# Altium PCB PCB.PcbDoc
Units mil, origin at the board's own origin, x right, y up, seen from the top; angles counter-clockwise.
Board outline 2375 x 2000 mil, 2 copper layers (Top Layer, Bottom Layer); 31 components, 14 nets, 83 pads, 43 vias.
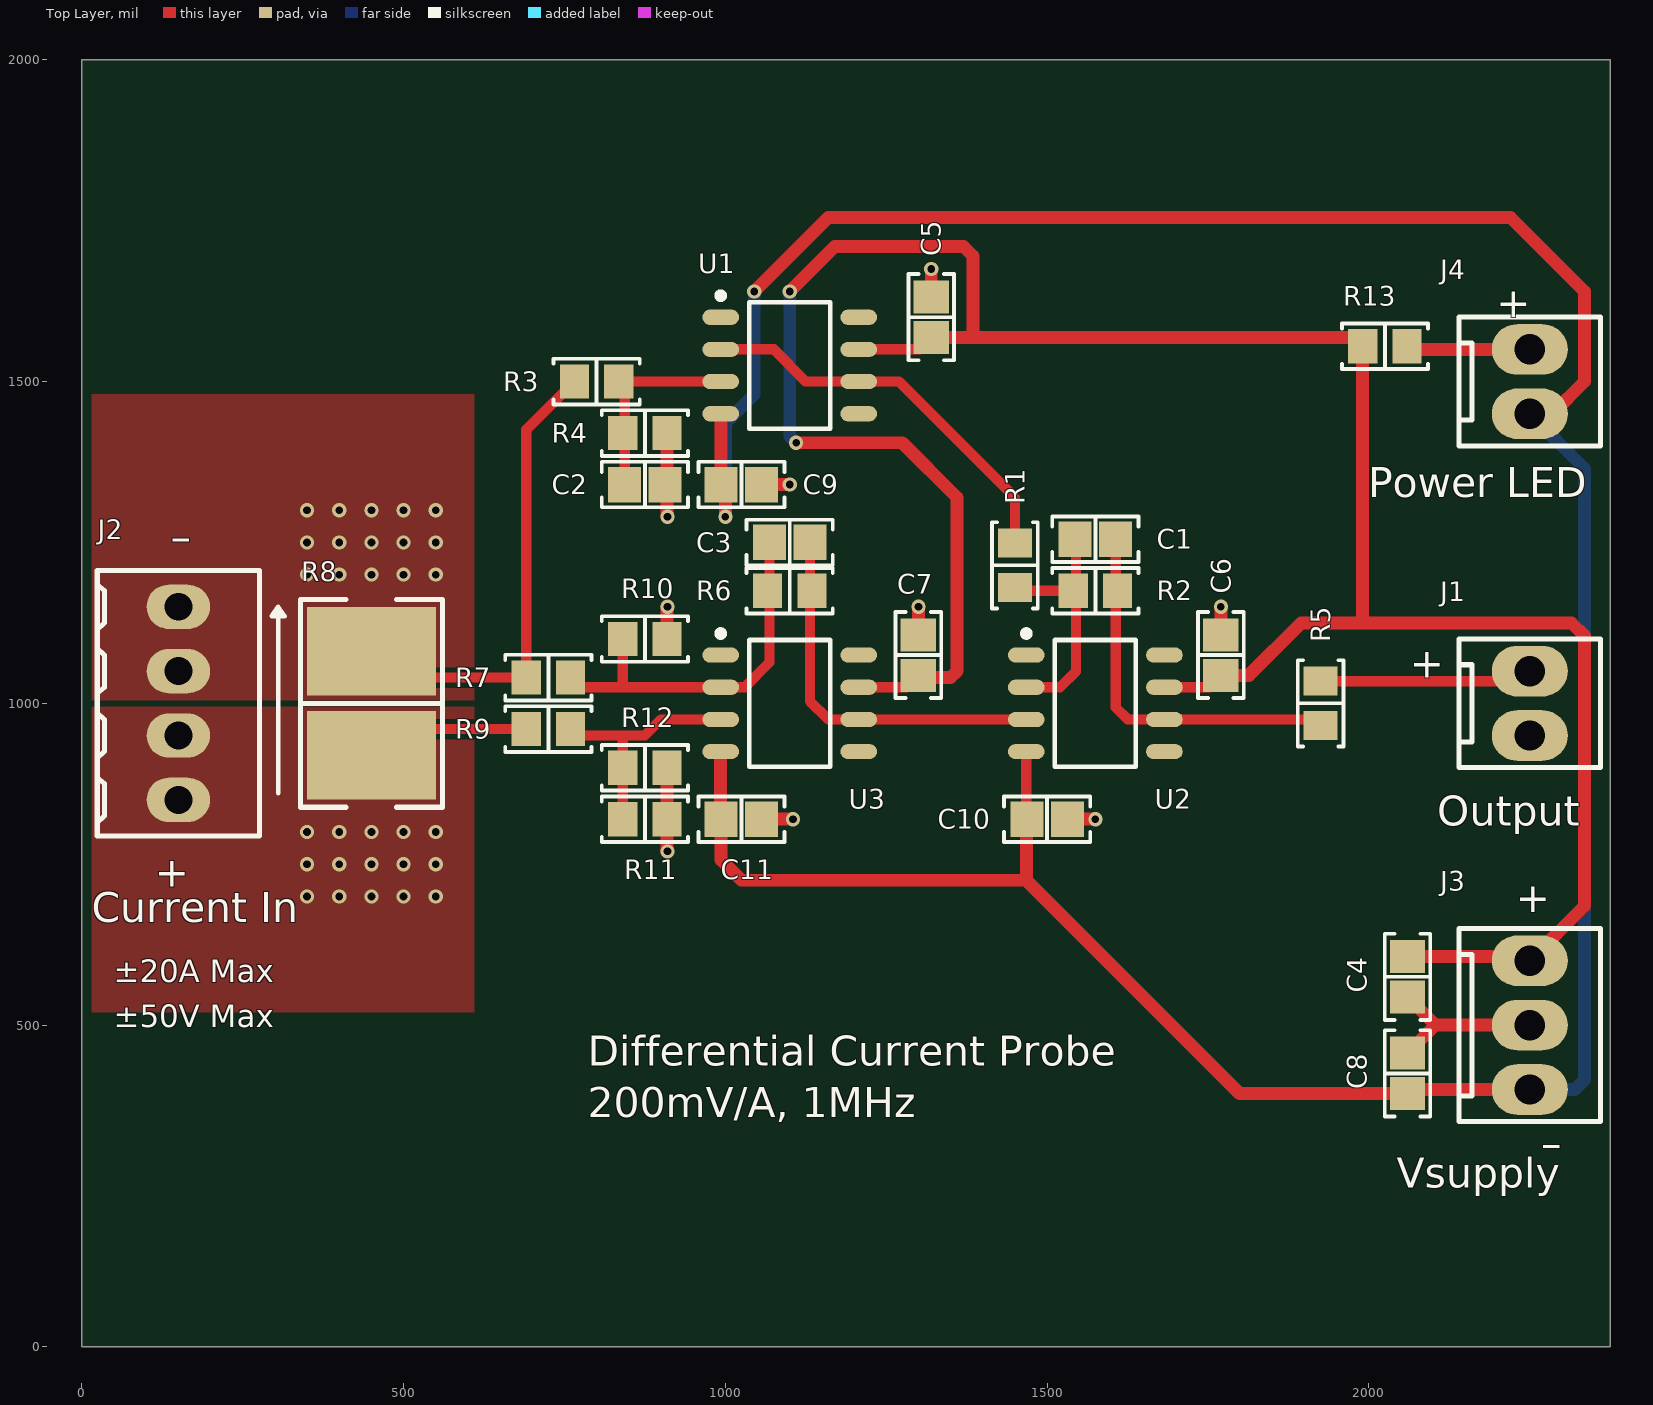
[diagram p0: Top Layer view]
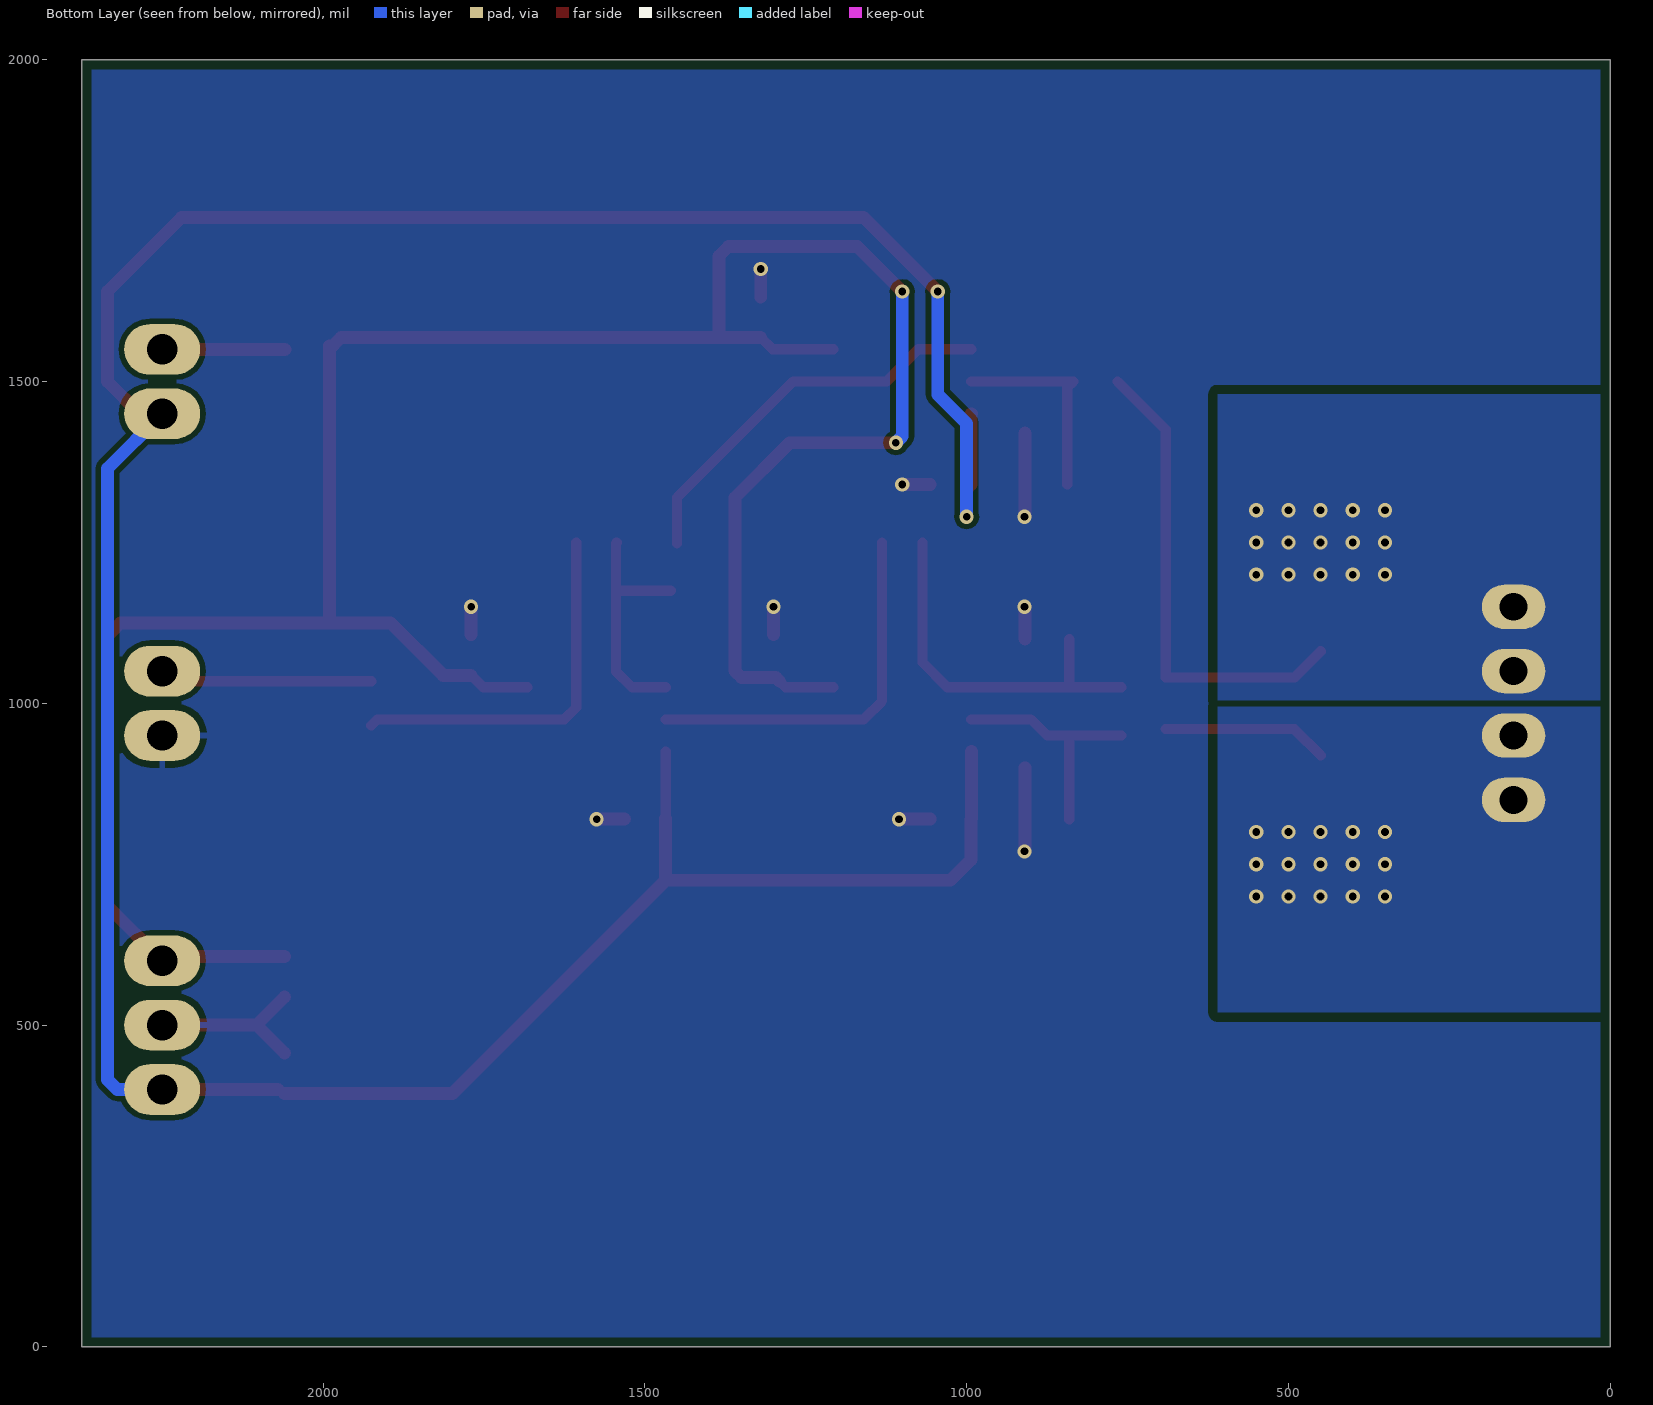
[diagram p1: Bottom Layer view, seen from below]
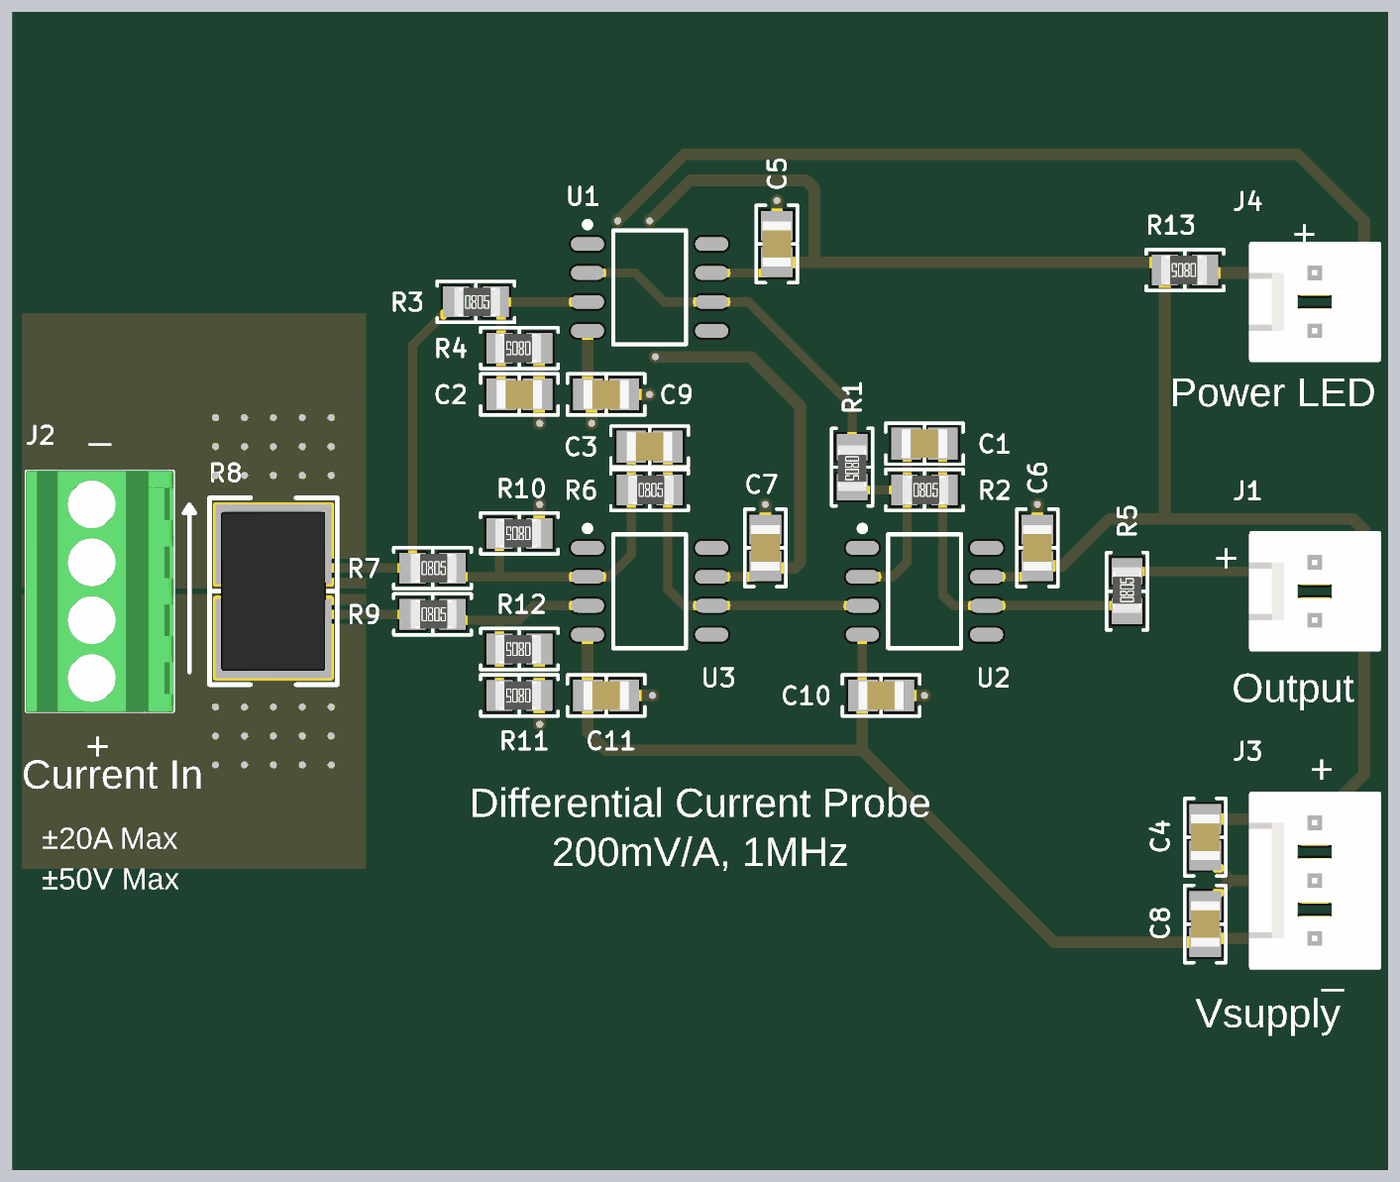
[diagram p2: 3D render of the assembled board from above, using the file's embedded part models]

## Layer stack, top to bottom
Top Solder: solder mask 0.4, Solder Resist, Dk 3.5
Top Layer: signal copper 1.4
Dielectric1: dielectric 12.6, FR-4, Dk 4.8
Bottom Layer: signal copper 1.4
Bottom Solder: solder mask 0.4, Solder Resist, Dk 3.5

## Board outline
0,0 0,2000 2375,2000 2375,0

## Design rules (kind name [scope] priority, off if disabled: settings)
AcuteAngle [All] p1: minimum=4.50000000000000E+0001 checktracksonly=FALSE
AssemblyTestpoint [(IsPad And (OnTopLayer Or OnBottomLayer)) Or (IsPad And OnMultiLayer)] p1: testpointundercomponent=FALSE minsize=40 maxsize=100 preferedsize=60 minholesize=0 maxholesize=40 preferedholesize=32 testpointgrid=1 usegrid=TRUE gridtolerance=0.01 allowsidetop=TRUE allowsidebottom=TRUE
BoardOutlineClearance [All] p1: gap=15 ignorepadtopadclearanceinfootprint=FALSE
Clearance Clearance_HV [InNetClass('HV') vs not InNetClass('HV')] p1: gap=15 ignorepadtopadclearanceinfootprint=FALSE
Clearance [All] p2: gap=8 ignorepadtopadclearanceinfootprint=FALSE
FabricationTestPointUsage TestPointUsage [All] p1: valid=0 allowmultiple=FALSE validrequireatleafs=TRUE
FabricationTestpoint Testpoint [(IsPad And (OnTopLayer Or OnBottomLayer)) Or (IsPad And OnMultiLayer)] p1: side=3 testpointundercomponent=TRUE minsize=40 maxsize=100 preferedsize=60 minholesize=0 maxholesize=40 preferedholesize=32 testpointgrid=1 allowsidetop=TRUE allowsidebottom=TRUE usegrid=TRUE gridtolerance=0.01
HoleSize [All] p1: absolutevalues=TRUE maxlimit=125 minlimit=12 maxpercent=80.000 minpercent=20.000
MinimumAnnularRing [All] p1: minimumring=5
MinimumSolderMaskSliver [All] p1: minsoldermaskwidth=4
PolygonConnect PolygonConnect_Isense [InNet('+ISense') or InNet('-ISense')] p1: connectstyle=Direct reliefconductorwidth=40 reliefentries=4 polygonreliefangle="90 Angle" airgapwidth=8
PolygonConnect [All] p2: thpad.connectstyle=Relief thpad.reliefconductorwidth=10 thpad.reliefentries=4 thpad.polygonreliefangle="90 Angle" thpad.airgapwidth=10 smdpad.connectstyle=Relief smdpad.reliefconductorwidth=10 smdpad.reliefentries=4 smdpad.polygonreliefangle="90 Angle" smdpad.airgapwidth=10 via.connectstyle=Direct via.reliefconductorwidth=10 via.reliefentries=4 via.polygonreliefangle="90 Angle" via.airgapwidth=10
RoutingVias [All] p1: holewidth=12 width=20 viastyle="Through Hole" minholewidth=10 minwidth=18 maxholewidth=28 maxwidth=50
SilkToSilkClearance [IsText] p1: silktosilkclearance=5
SilkToSolderMaskClearance SilkscreenOverComponentPads [IsPad vs IsText] p1: minsilkscreentomaskgap=5 clearancetoexposedcopper=TRUE
SolderMaskExpansion [All] p1: expansion=4 istentingtop=FALSE
UnRoutedNet [All] p1: checkbadconnections=TRUE
Width [All] p1: maxlimit=24 minlimit=8 preferedwidth=10
22 further rules are at their usual default settings.

## Classes and differential pairs
net class HV: +ISense -ISense

## Components (designator, comment, footprint, x,y, rotation, side; value= is the part's Value field where it differs from the comment)
C1 "1.1pF" "CAP 0805_2012" 1575,1255 r0 top
C2 "1.1pF" "CAP 0805_2012" 875,1340 r0 top
C3 "1.1pF" "CAP 0805_2012" 1100,1250 r0 top
C4 "10µF" "CAP 0805_2012" 2060,575 r90 top
C5 "0.1µF" "CAP 0805_2012" 1320,1600 r90 top
C6 "0.1µF" "CAP 0805_2012" 1770,1075 r90 top
C7 "0.1µF" "CAP 0805_2012" 1300,1075 r90 top
C8 "10µF" "CAP 0805_2012" 2060,425 r90 top
C9 "0.1µF" "CAP 0805_2012" 1025,1340 r180 top
C10 "0.1µF" "CAP 0805_2012" 1500,820 r180 top
C11 "0.1µF" "CAP 0805_2012" 1025,820 r180 top
J1 "Output" "MOLEX KK 0022272021" 2250,1000 r270 top
J2 "Current In" "TE 282834-4" 150,1000 r90 top
J3 "Vsupply" "MOLEX KK 0022272031" 2250,500 r270 top
J4 "Power LED" "MOLEX KK 0022272021" 2250,1500 r270 top
R1 "200 Ohms" "RES 0805_2012" 1450,1214.45 r270 top
R2 "3.83 kOhms" "RES 0805_2012" 1575,1175 r0 top
R3 "100 kOhms" "RES 0805_2012" 800,1500 r0 top
R4 "19.1 Ohms" "RES 0805_2012" 875,1420 r180 top
R5 "49.9 Ohms" "RES 0805_2012" 1925,1000 r90 top
R6 "100 kOhms" "RES 0805_2012" 1100,1175 r0 top
R7 "100 kOhms" "RES 0805_2012" 725,1040 r0 top
R8 "10 mOhms" "VISHAY WSHP2818" 450,1000 r90 top
R9 "100 kOhms" "RES 0805_2012" 725,960 r0 top
R10 "20 kOhms" "RES 0805_2012" 875,1100 r180 top
R11 "20 kOhms" "RES 0805_2012" 875,820 r180 top
R12 "100 kOhms" "RES 0805_2012" 875,900 r180 top
R13 "3.83 kOhms" "RES 0805_2012" 2025,1555 r180 top
U1 "OPA192" SOIC127P600X175-8N 1100,1525 r0 top
U2 "OPA192" SOIC127P600X175-8N 1575,1000 r0 top
U3 "OPA192" SOIC127P600X175-8N 1100,1000 r0 top

## Footprints (in the part's own frame and the unit in brackets; to place one, negate y for a bottom-side part, rotate by r counter-clockwise, add the part's x,y. Pads: shape width x height; smd on the part's side, far side on the other; paste and mask are expansions set on the pad)
"CAP 0805_2012" [mm] "Chip Capacitor, 2-Leads, Body 2.00x1.20mm, IPC Medium Density"
  rect 1.3x1.4 smd: 1(-0.8,0) 2(0.8,0)
  silkscreen extent -1.7,-0.9 1.7,0.9, body extent -1,-0.64 1,0.64, height 1.26
"MOLEX KK 0022272021" [mm]
  oval 2x3 hole 1.2: 1(-1.27,0) 2(1.27,0)
  silkscreen extent -2.54,-2.79 2.54,2.79, body extent -2.54,-2.9 2.54,2.9, height 11.7
"MOLEX KK 0022272031" [mm]
  oval 2x3 hole 1.2: 1(-2.54,0) 2(0,0) 3(2.54,0)
  silkscreen extent -3.81,-2.79 3.81,2.79, body extent -3.81,-2.9 3.81,2.9, height 11.7
"RES 0805_2012" [mm] "Chip Resistor, 2-Leads, Body 2.00x1.25mm, IPC Medium Density"
  rect 1.15x1.35 smd: 1(-0.875,0) 2(0.875,0)
  silkscreen extent -1.7,-0.9 1.7,0.9, body extent -0.95,-0.62 1.05,0.63, height 0.6
SOIC127P600X175-8N [mm] "SOIC, 8-Leads, Body 4.90x3.90mm, Pitch 1.27mm, IPC Medium Density"
  oval 1.45x0.6 smd: 1(-2.725,1.905) 2(-2.725,0.635) 3(-2.725,-0.635) 4(-2.725,-1.905) 5(2.725,-1.905) 6(2.725,-0.635) 7(2.725,0.635) 8(2.725,1.905)
  silkscreen extent -2.85,-2.5 1.6,2.88, body extent -2,-2.5 2,2.5, height 1.75
"TE 282834-4" [mm]
  oval 1.75x2.5 hole 1.1: 1(-3.81,0) 2(-1.27,0) 3(1.27,0) 4(3.81,0)
  silkscreen extent -5.24,-3.2 5.24,3.2, body extent -5.31,-3.25 5.31,3.25, height 10
"VISHAY WSHP2818" [mm] "Chip Resistor, 2-Leads, Body 7.10x4.60mm, IPC Medium Density"
  rect 3.5x5.1 smd: 1(-2.055,0) 2(2.055,0)
  silkscreen extent -4.1,-2.8 4.1,2.8, body extent -3.55,-2.3 3.55,2.3, height 1.5

## Part data
C1 C2 C3: library part 600F1R1BT250XT, "CAP CER 1.1PF 250V C0G/NP0 0805", Device Package="0805 (2012 Metric)", Manufacturer="American Technical Ceramics", Operating Temperature="-55°C ~ 125°C", Supplier Part Number 1=1284-1028-1-ND, Temperature Coefficient="C0G, NP0", Tolerance=±0.1pF, Voltage - Rated=250V, Applications="RF, Microwave, High Frequency, Bypass, Decoupling", Capacitance=1.1pF, ComponentLink1Description=Datasheet, ComponentLink1URL=http://www.atceramics.com/UserFiles/600f.pdf, ComponentLink2Description="DigiKey Link", ComponentLink2URL=http://digikey.com/product-detail/en/american-technical-ceramics/600F1R1BT250XT/1284-1028-1-ND/3905408, Features="High Q, Low Loss, Ultra Low ESR", LastUpdated="1/21/2020 12:02:44 AM", Lifecycle Status=Active, Minimum Order=1, Mounting Type="Surface Mount, MLCC", Package / Case="0805 (2012 Metric)", Packaging=TapeAndReel, Part Number=600F1R1BT250XT, Part Status=Active, PartId=15482, Price=0.25, Series="ATC 600F", Size / Dimension="0.079\" L x 0.049\" W (2.01mm x 1.24mm)", Supplier 1=DigiKey, Thickness (Max)="0.051\" (1.30mm)"
C4 C8: library part CL21A106KAYNNNE, "CAP CER 10UF 25V X5R 0805", Device Package="0805 (2012 Metric)", Manufacturer="Samsung Electro-Mechanics", Operating Temperature="-55°C ~ 85°C", Supplier Part Number 1=1276-2891-1-ND, Temperature Coefficient=X5R, Tolerance=±10%, Voltage - Rated=25V, Applications="General Purpose", Capacitance=10µF, ComponentLink1Description=Datasheet, ComponentLink1URL=http://www.samsungsem.com/kr/support/product-search/mlcc/CL21A106KAYNNNE.jsp, ComponentLink2Description="DigiKey Link", ComponentLink2URL=http://digikey.com/product-detail/en/samsung-electro-mechanics/CL21A106KAYNNNE/1276-2891-1-ND/3890977, LastUpdated="1/21/2020 12:02:50 AM", Lifecycle Status=Active, Minimum Order=1, Mounting Type="Surface Mount, MLCC", Package / Case="0805 (2012 Metric)", Packaging=TapeAndReel, Part Number=CL21A106KAYNNNE, Part Status=Active, PartId=13105, Price=0.05, Series=CL, Size / Dimension="0.079\" L x 0.049\" W (2.00mm x 1.25mm)", Supplier 1=DigiKey, Thickness (Max)="0.057\" (1.45mm)"
C5 C6 C7 C9 C10 C11: library part CC0805MRX7R8BB104, "CAP CER 0.1UF 25V X7R 0805", Device Package="0805 (2012 Metric)", Manufacturer=Yageo, Operating Temperature="-55°C ~ 125°C", Supplier Part Number 1=311-4348-1-ND, Temperature Coefficient=X7R, Tolerance=±20%, Voltage - Rated=25V, Applications="General Purpose", Capacitance=0.1µF, ComponentLink1Description=Datasheet, ComponentLink1URL=https://www.yageo.com/upload/media/product/productsearch/datasheet/mlcc/UPY-GPHC_X7R_6.3V-to-50V_18.pdf, ComponentLink2Description="DigiKey Link", ComponentLink2URL=http://digikey.com/product-detail/en/yageo/CC0805MRX7R8BB104/311-4348-1-ND/8025437, LastUpdated="1/21/2020 12:02:57 AM", Lifecycle Status=Active, Minimum Order=1, Mounting Type="Surface Mount, MLCC", Package / Case="0805 (2012 Metric)", Packaging=TapeAndReel, Part Number=CC0805MRX7R8BB104, Part Status=Active, PartId=8377, Price=0.02, Series=CC, Size / Dimension="0.079\" L x 0.049\" W (2.00mm x 1.25mm)", Supplier 1=DigiKey, Thickness (Max)="0.037\" (0.95mm)"
J1 J4: library part 0022272021, "CONN HEADER VERT 2POS 2.54MM", Insulation Color=Natural, Manufacturer=Molex, Material Flammability Rating="UL94 V-0", Supplier Part Number 1=WM4111-ND, ComponentLink1Description=Datasheet, ComponentLink1URL=https://www.molex.com/pdm_docs/sd/022272021_sd.pdf, ComponentLink2Description="DigiKey Link", ComponentLink2URL=http://digikey.com/product-detail/en/molex/0022272021/WM4111-ND/1130577, Connector Type=Header, Contact Finish - Mating=Tin, Contact Finish - Post=Tin, Contact Finish Thickness - Mating="100.0µin (2.54µm)", Contact Length - Mating="0.295\" (7.49mm)", Contact Length - Post="0.140\" (3.56mm)", Contact Material=Brass, Contact Shape=Square, Contact Type="Male Pin", Fastening Type="Friction Lock", Insulation Height="0.461\" (11.70mm)", Insulation Material="Polyamide (PA), Nylon", LastUpdated="1/12/2020 11:51:43 PM", Lifecycle Status=Active, Minimum Order=1, Mounting Type="Through Hole", Number of Positions=2, Number of Positions Loaded=All, Number of Rows=1, Overall Contact Length="0.560\" (14.22mm)", Packaging=Bulk, Part Number=0022272021, Part Status=Active, PartId=76, Pitch - Mating="0.100\" (2.54mm)", Price=0.27, Series="KK 6410", Shrouding="Shrouded - 1 Wall", Style="Board to Cable/Wire", Supplier 1=DigiKey, Termination=Solder
J2: library part 282834-4, "TERM BLK 4P SIDE ENT 2.54MM PCB", Color=Green, Current=10A, Manufacturer="TE Connectivity AMP Connectors", Supplier Part Number 1=A98335-ND, Voltage=150V, ComponentLink1Description=Datasheet, ComponentLink1URL=https://www.te.com/commerce/DocumentDelivery/DDEController?Action=srchrtrv&DocNm=282834&DocType=Customer+Drawing&DocLang=English, ComponentLink2Description="DigiKey Link", ComponentLink2URL=http://digikey.com/product-detail/en/te-connectivity-amp-connectors/282834-4/A98335-ND/1153265, LastUpdated="1/15/2020 4:16:05 AM", Lifecycle Status=Active, Mating Orientation="Horizontal with Board", Minimum Order=1, Mounting Type="Through Hole", Number of Levels=1, Packaging=Bulk, Part Number=282834-4, Part Status=Active, Pitch="0.100\" (2.54mm)", Positions Per Level=4, Price=2.68, Series=Buchanan, Supplier 1=DigiKey, Wire Gauge="16-30 AWG", Wire Termination="Screw - Rising Cage Clamp"
J3: library part 0022272031, "CONN HEADER VERT 3POS 2.54MM", Insulation Color=Natural, Manufacturer=Molex, Material Flammability Rating="UL94 V-0", Supplier Part Number 1=WM4112-ND, ComponentLink1Description=Datasheet, ComponentLink1URL=https://www.molex.com/pdm_docs/sd/022272031_sd.pdf, ComponentLink2Description="DigiKey Link", ComponentLink2URL=http://digikey.com/product-detail/en/molex/0022272031/WM4112-ND/1130578, Connector Type=Header, Contact Finish - Mating=Tin, Contact Finish - Post=Tin, Contact Finish Thickness - Mating="100.0µin (2.54µm)", Contact Length - Mating="0.295\" (7.49mm)", Contact Length - Post="0.140\" (3.56mm)", Contact Material=Brass, Contact Shape=Square, Contact Type="Male Pin", Fastening Type="Friction Lock", Insulation Height="0.461\" (11.70mm)", Insulation Material="Polyamide (PA), Nylon", LastUpdated="1/12/2020 11:51:54 PM", Lifecycle Status=Active, Minimum Order=1, Mounting Type="Through Hole", Number of Positions=3, Number of Positions Loaded=All, Number of Rows=1, Overall Contact Length="0.560\" (14.22mm)", Packaging=Bulk, Part Number=0022272031, Part Status=Active, PartId=77, Pitch - Mating="0.100\" (2.54mm)", Price=0.37, Series="KK 6410", Shrouding="Shrouded - 1 Wall", Style="Board to Cable/Wire", Supplier 1=DigiKey, Termination=Solder
R1: library part ERJ-PB6B2000V, "RES SMD 200 OHM 0.1% 1/4W 0805", Device Package="0805 (2012 Metric)", Manufacturer="Panasonic Electronic Components", Operating Temperature="-55°C ~ 155°C", Power (Watts)="0.25W, 1/4W", Ratings=AEC-Q200, Supplier Device Package=0805, Supplier Part Number 1=P20512CT-ND, Temperature Coefficient=±50ppm/°C, Tolerance=±0.1%, ComponentLink1Description=Datasheet, ComponentLink1URL=https://industrial.panasonic.com/cdbs/www-data/pdf/RDM0000/AOA0000C328.pdf, ComponentLink2Description="DigiKey Link", ComponentLink2URL=http://digikey.com/product-detail/en/panasonic-electronic-components/ERJ-PB6B2000V/P20512CT-ND/6214767, Composition="Thick Film", Features="Automotive AEC-Q200, Pulse Withstanding", Height - Seated (Max)="0.028\" (0.70mm)", LastUpdated="1/21/2020 1:48:33 AM", Lifecycle Status=Active, Minimum Order=1, Number of Terminations=2, Package / Case="0805 (2012 Metric)", Packaging=TapeAndReel, Part Number=ERJ-PB6B2000V, Part Status=Active, PartId=31144, Price=0.04, Resistance="200 Ohms", Series=ERJ, Size / Dimension="0.079\" L x 0.049\" W (2.00mm x 1.25mm)", Supplier 1=DigiKey
R2 R13: library part ERJ-PB6D3831V, "RES SMD 3.83K OHM 0.5% 1/4W 0805", Device Package="0805 (2012 Metric)", Manufacturer="Panasonic Electronic Components", Operating Temperature="-55°C ~ 155°C", Power (Watts)="0.25W, 1/4W", Ratings=AEC-Q200, Supplier Device Package=0805, Supplier Part Number 1=P21084CT-ND, Temperature Coefficient=±50ppm/°C, Tolerance=±0.5%, ComponentLink1Description=Datasheet, ComponentLink1URL=https://industrial.panasonic.com/cdbs/www-data/pdf/RDM0000/AOA0000C328.pdf, ComponentLink2Description="DigiKey Link", ComponentLink2URL=http://digikey.com/product-detail/en/panasonic-electronic-components/ERJ-PB6D3831V/P21084CT-ND/6215339, Composition="Thick Film", Features="Automotive AEC-Q200, Pulse Withstanding", Height - Seated (Max)="0.028\" (0.70mm)", LastUpdated="1/21/2020 1:46:41 AM", Lifecycle Status=Active, Minimum Order=1, Number of Terminations=2, Package / Case="0805 (2012 Metric)", Packaging=TapeAndReel, Part Number=ERJ-PB6D3831V, Part Status=Active, PartId=35478, Price=0.03, Resistance="3.83 kOhms", Series=ERJ, Size / Dimension="0.079\" L x 0.049\" W (2.00mm x 1.25mm)", Supplier 1=DigiKey
R3 R6 R7 R9 R12: library part ERA-6AEB104V, "RES 100K OHM 0.1% 1/8W 0805", Device Package="0805 (2012 Metric)", Manufacturer="Panasonic Electronic Components", Operating Temperature="-55°C ~ 155°C", Power (Watts)="0.125W, 1/8W", Ratings=AEC-Q200, Supplier Device Package=0805, Supplier Part Number 1=P100KDACT-ND, Temperature Coefficient=±25ppm/°C, Tolerance=±0.1%, ComponentLink1Description=Datasheet, ComponentLink1URL=https://industrial.panasonic.com/cdbs/www-data/pdf/RDM0000/AOA0000C307.pdf, ComponentLink2Description="DigiKey Link", ComponentLink2URL=http://digikey.com/product-detail/en/panasonic-electronic-components/ERA-6AEB104V/P100KDACT-ND/1465995, Composition="Thin Film", Features="Automotive AEC-Q200", Height - Seated (Max)="0.024\" (0.60mm)", LastUpdated="1/21/2020 1:49:56 AM", Lifecycle Status=Active, Minimum Order=1, Number of Terminations=2, Package / Case="0805 (2012 Metric)", Packaging=TapeAndReel, Part Number=ERA-6AEB104V, Part Status=Active, PartId=28063, Price=0.04, Resistance="100 kOhms", Series=ERA-6A, Size / Dimension="0.079\" L x 0.049\" W (2.00mm x 1.25mm)", Supplier 1=DigiKey
R4: library part 5-1625868-4, "RES SMD 19.1 OHM 0.1% 1/4W 0805", Device Package="0805 (2012 Metric)", Manufacturer="TE Connectivity Passive Product", Operating Temperature="-55°C ~ 155°C", Power (Watts)="0.25W, 1/4W", Supplier Device Package=0805, Supplier Part Number 1=A110378CT-ND, Temperature Coefficient=±25ppm/°C, Tolerance=±0.1%, ComponentLink1Description=Datasheet, ComponentLink1URL=https://www.te.com/commerce/DocumentDelivery/DDEController?Action=srchrtrv&DocNm=1773272&DocType=DS&DocLang=English, ComponentLink2Description="DigiKey Link", ComponentLink2URL=http://digikey.com/product-detail/en/te-connectivity-passive-product/5-1625868-4/A110378CT-ND/4034733, Composition="Thin Film", Height - Seated (Max)="0.026\" (0.65mm)", LastUpdated="1/21/2020 1:47:41 AM", Lifecycle Status=Active, Minimum Order=1, Number of Terminations=2, Package / Case="0805 (2012 Metric)", Packaging=TapeAndReel, Part Number=5-1625868-4, Part Status=Active, PartId=33143, Price=0.15, Resistance="19.1 Ohms", Series="RP73P, Holsworthy", Size / Dimension="0.079\" L x 0.049\" W (2.00mm x 1.25mm)", Supplier 1=DigiKey
R5: library part ERJ-6ENF49R9V, "RES SMD 49.9 OHM 1% 1/8W 0805", Device Package="0805 (2012 Metric)", Manufacturer="Panasonic Electronic Components", Operating Temperature="-55°C ~ 155°C", Power (Watts)="0.125W, 1/8W", Ratings=AEC-Q200, Supplier Device Package=0805, Supplier Part Number 1=P49.9CCT-ND, Temperature Coefficient=±100ppm/°C, Tolerance=±1%, ComponentLink1Description=Datasheet, ComponentLink1URL=https://industrial.panasonic.com/cdbs/www-data/pdf/RDA0000/AOA0000C304.pdf, ComponentLink2Description="DigiKey Link", ComponentLink2URL=http://digikey.com/product-detail/en/panasonic-electronic-components/ERJ-6ENF49R9V/P49.9CCT-ND/118581, Composition="Thick Film", Features="Automotive AEC-Q200", Height - Seated (Max)="0.028\" (0.70mm)", LastUpdated="1/21/2020 1:48:04 AM", Lifecycle Status=Active, Minimum Order=1, Number of Terminations=2, Package / Case="0805 (2012 Metric)", Packaging=TapeAndReel, Part Number=ERJ-6ENF49R9V, Part Status=Active, PartId=32256, Price=0.01, Resistance="49.9 Ohms", Series=ERJ, Size / Dimension="0.079\" L x 0.049\" W (2.00mm x 1.25mm)", Supplier 1=DigiKey
R8: library part WSHP2818R0100FEA, "RES 0.01 OHM 1% 10W 2818", Device Package=Nonstandard, Manufacturer="Vishay Dale", Operating Temperature="-65°C ~ 170°C", Power (Watts)=10W, Ratings=AEC-Q200, Supplier Device Package=2818, Supplier Part Number 1=541-3276-1-ND, Temperature Coefficient=±75ppm/°C, Tolerance=±1%, ComponentLink1Description=Datasheet, ComponentLink1URL=http://www.vishay.com/docs/30347/wshp2818.pdf, ComponentLink2Description="DigiKey Link", ComponentLink2URL=http://digikey.com/product-detail/en/vishay-dale/WSHP2818R0100FEA/541-3276-1-ND/6605252, Composition="Metal Element", Features="Automotive AEC-Q200, Current Sense, Moisture Resistant, Pulse Withstanding", Height - Seated (Max)="0.069\" (1.75mm)", LastUpdated="2/4/2020 3:03:01 AM", Lifecycle Status=Active, Minimum Order=1, Number of Terminations=2, Package / Case=Nonstandard, Packaging=TapeAndReel, Part Number=WSHP2818R0100FEA, Part Status=Active, PartId=2681, Price=0.62, Resistance="10 mOhms", Series=WSHP2818, Size / Dimension="0.280\" L x 0.181\" W (7.10mm x 4.60mm)", Supplier 1=DigiKey
R10 R11: library part ERA-6ARW203V, "RES 20K OHM 0.05% 1/8W 0805", Device Package="0805 (2012 Metric)", Manufacturer="Panasonic Electronic Components", Operating Temperature="-55°C ~ 155°C", Power (Watts)="0.125W, 1/8W", Ratings=AEC-Q200, Supplier Device Package=0805, Supplier Part Number 1=P20KBSCT-ND, Temperature Coefficient=±10ppm/°C, Tolerance=±0.05%, ComponentLink1Description=Datasheet, ComponentLink1URL=https://industrial.panasonic.com/cdbs/www-data/pdf/RDM0000/AOA0000C307.pdf, ComponentLink2Description="DigiKey Link", ComponentLink2URL=http://digikey.com/product-detail/en/panasonic-electronic-components/ERA-6ARW203V/P20KBSCT-ND/3073407, Composition="Thin Film", Features="Automotive AEC-Q200", Height - Seated (Max)="0.024\" (0.60mm)", LastUpdated="1/21/2020 1:45:31 AM", Lifecycle Status=Active, Minimum Order=1, Number of Terminations=2, Package / Case="0805 (2012 Metric)", Packaging=TapeAndReel, Part Number=ERA-6ARW203V, Part Status=Active, PartId=37966, Price=0.24, Resistance="20 kOhms", Series=ERA-6A, Size / Dimension="0.079\" L x 0.049\" W (2.00mm x 1.25mm)", Supplier 1=DigiKey
U1 U2 U3: library part OPA192ID, "Precision, Rail to Rail I/O, Low Vos, Low Ib Op Amp", Manufacturer="Texas Instruments", Supplier Part Number 1=296-44516-5-ND, Component Type="Op Amp", ComponentLink1Description=Datasheet, ComponentLink1URL=http://www.ti.com/lit/ds/symlink/opa192.pdf, Created Date=2017-09-25, Designer="Alex Davis", MountType=SMT, PartNumber=OPA192, RoHS?=Yes, Supplier 1=Digi-Key

## Via types
v1: diameter 22, hole 12, Top Layer to Bottom Layer, tented both sides, 43 vias

## Nets (pads, with @x,y where several pads share a name; then routed paths per layer and width w, separated by ;. In a path a pad name is that pad's centre, name@x,y a point inside that pad or via, vN(x,y) a via of type N, cw(c..) or ccw(c..) an arc to the next point about the centre after c; other vN are vias at no path point)
+9V: C4.2 C5.1 C6.1 C7.1 J3.1 R13.2 U1.7 U2.7 U3.7 | length 4068.3
  Top Layer w16: U3.7 1281.5,1025 C7.1@1290.75,1034.25 ; U1.7 1301.5,1550 C5.1 ; U2.7 1751.5,1025 C6.1
  Top Layer w20: v1(1100,1640) 1170.01,1710 1370,1710 1385,1695 1385,1568.5 ; v1(1110,1405) 1275,1405 1360,1320 1360,1050 1350,1040 1296.5,1040 C7.1@1290.75,1034.25 ; C5.1 1385,1568.5 ; C6.1 1813.51,1043.5 1895.01,1125 1990,1125 ; R13.2@1990.55,1550 1972.05,1568.5 1385,1568.5 ; R13.2 1990,1554.45 1990,1125 ; C4.2 2243.51,606.5 J3.1 2335,685.01 2335,1105 2315,1125 1990,1125
  Bottom Layer w20: v1(1100,1640) 1100,1415 v1(1110,1405)
+ISense: J2.1 J2.2 R8.1 R9.1 | length 257.5
  Top Layer w16: R8.1 490.91,960 R9.1
  other v1: 350.01,699.99 400.01,699.99 450.01,699.99 500.01,699.99 550.01,699.99 350.01,749.99 400.01,749.99 450.01,749.99 500.01,749.99 550.01,749.99 350.01,799.99 400.01,799.99 450.01,799.99 500.01,799.99 550.01,799.99
-9V: C8.1 C9.2 C10.2 C11.2 J3.3 J4.2 U1.4 U2.4 U3.4 | length 5089.7
  Top Layer w16: C10.2@1467.72,820.78 U2.4
  Top Layer w20: U3.4 992.72,820.78 C11.2 993.51,756.49 1025,725 1170,725 1467.72,725 ; U1.4 993.51,1449.21 C9.2 1000,1333.5 v1(1000,1290) ; v1(1045,1640) 1160.01,1755 2220,1755 2335,1640 2335,1500 2285,1450 J4.2 ; C10.2@1467.72,820.78 1467.72,725 ; C8.1 1799.21,393.5 1467.72,725 ; C8.1@2070,400 J3.3
  Bottom Layer w20: v1(1000,1290) 1000,1435 1045,1480 v1(1045,1640) ; J3.3 2320,400 2335,415 2335,1365.01 J4.2
-ISense: J2.3 J2.4 R3.1 R7.1 R8.2 | length 748.6
  Top Layer w16: R8.2 490.91,1040 R7.1 690.55,1425 R3.1
  other v1: 350,1200 400,1200 450,1200 500,1200 550,1200 350,1250 400,1250 450,1250 500,1250 550,1250 350,1300 400,1300 450,1300 500,1300 550,1300
GND: C2.2 C4.1 C5.2 C6.2 C7.2 C8.2 C9.1 C10.1 C11.1 J1.2 J3.2 R4.1 R10.1 R11.1 R12.1 | length 927.2
  Top Layer w20: R11.1 R12.1 909.45,770 v1(910,770) ; R10.1 909.45,1150 v1(910,1150) ; R4.1 909.45,1290 v1(910,1290) ; C11.1 v1(1105,820) ; C9.1 v1(1100.01,1340) ; C7.2 v1(1300,1150) ; C5.2 v1(1320,1675) ; C10.1 v1(1575.01,820) ; C6.2 v1(1770,1150) ; C8.2 2103.5,500 ; C4.1 2103.5,500 ; J3.2 2103.5,500
NetC1_1: C1.1 R1.2 R2.1 U2.2 | length 369.4
  Top Layer w16: R1.2@1459.45,1175 R2.1 ; U2.2 1520,1025 1545,1050 1545,1175 1545,1248.5 C1.1@1543.51,1250
NetC1_2: C1.2 R2.2 R5.1 U2.6 | length 586.6
  Top Layer w16: C1.2@1606.5,1250 1606.5,1175 1606.5,993.5 1625,975 U2.6 1915.55,975 R5.1
NetC2_1: C2.1 R3.2 R4.2 U1.3 | length 322
  Top Layer w16: C2.1 843.51,1490.94 R3.2 U1.3
NetC3_1: C3.1 R6.1 R7.2 R10.2 U3.2 | length 586.7
  Top Layer w16: R7.2@759.45,1025 840,1025 ; R10.2 840.55,1025.55 840,1025 ; C3.1 1068.51,1175 1068.51,1063.5 1030,1025 U3.2 840,1025
NetC3_2: C3.2 R6.2 U2.3 U3.6 | length 594.5
  Top Layer w16: C3.2 1131.5,1003.5 1160,975 U3.6 U2.3
NetJ4_1: J4.1 R13.1 | length 190.6
  Top Layer w20: R13.1@2059.45,1550 J4.1
NetR9_2: R9.2 R11.2 R12.2 U3.3 | length 373.9
  Top Layer w16: R9.2@759.45,950 840,950 ; R11.2 R12.2 840.55,949.45 840,950 ; U3.3 900,975 875,950 840,950
Vcorr: R1.1 U1.2 U1.6 | length 623.7
  Top Layer w16: U1.2 1075,1550 1125,1500 U1.6 1270,1500 1450,1320 R1.1
Vout: J1.1 R5.2 | length 331.4
  Top Layer w16: R5.2 2234.45,1034.45 J1.1
pads on no net: U1.1 U1.5 U1.8 U2.1 U2.5 U2.8 U3.1 U3.5 U3.8

## Polygon pours and split planes (outlines as drawn)
GND on Bottom Layer "GND_L02_P005" (solid, remove dead copper, pour order 5): 0,0 0,2000 2375,2000 2375,0
-ISense on Bottom Layer "-ISENSE_L02_P000" (solid, pour order 0): 0,1480 610,1480 610,1005 0,1005
+ISense on Bottom Layer "+ISENSE_L02_P002" (solid, pour order 2): 0,520 610,520 610,995 0,995
-ISense on Top Layer "-ISENSE_L01_P003" (solid, pour order 3): 0,1480 610,1480 610,1005 0,1005
+ISense on Top Layer "+ISENSE_L01_P004" (solid, pour order 4): 0,520 610,520 610,995 0,995

## Silkscreen, mask and mechanical layers (free items; w line width, h text height)
Top Overlay:
  lines w7: 305,860 305,1150 ; 308.56,1138.03 301.74,1138.74 305,1150 ; 305,1150 315,1135 295,1135 305,1150
  text "+" at 2251.87,1655.2 h80 r180
  text "–" at 169.87,1285.98 h80 r180
  text "+" at 2116.87,1095.2 h80 r180
  text "+" at 166.88,770.2 h80 r180
  text "+" at 2281.87,730.2 h80 r180
  text "±20A Max" at 50,555 h60
  text "±50V Max" at 50,485 h60
  text "–" at 2299.87,343.5 h80 r180
  text "Differential Current Probe / 200mV/A, 1MHz" at 785.94,341.4 h80
M9 Frame:
  drawing of 1858 lines, arcs and shapes, not listed
  text "1" at 401.34,9365 h70
  text "2" at 3227,9365 h70
  text "3" at 6052,9365 h70
  text "4" at 8893.01,9365 h70
  text "5" at 11727,9365 h70
  text "6" at 14562,9365 h70
  text "A" at -925,8122 h70
  text "A" at 15875,8122 h70
  text "B" at -925,5388.02 h70
  text "B" at 15875,5388.02 h70
  text "C" at -925,2607 h70
  text "C" at 15875,2607 h70
  text "D" at -925,-215 h70
  text "D" at 15875,-215 h70
  text "Title: '.PRJ_Title'" at 12850,-424.99 h70
  text "Rev: .PCB_Rev" at 15260,-424.99 h70
  text "Designed For: '.PRJ_Customer'" at 12850,-622.5 h45
  text "PART NO.:" at 12850,-800 h45
  text "DATE:" at 14950,-800 h45
  text "'.PRJ_Number'" at 12900,-920 h70
  text ".PRINT_DATE" at 15000,-920 h70
  text "Generated  '.Print_Time' '.Print_Date'" at -750,-1030 h70
  text "'.Print_Scale'" at 1660,-1030 h70
  text "FILE NAME:" at 12850,-1100 h45
  text ".PCB_FILE_NAME_NO_PATH" at 12900,-1220 h70
  text "'.PRJ_Copyright'" at -750,-1230 h140
  text "1" at 401.34,-1435 h70
  text "2" at 3227,-1435 h70
  text "3" at 6052,-1435 h70
  text "4" at 8893.01,-1435 h70
  text "5" at 11727,-1435 h70
  text "6" at 14562,-1435 h70
Board Outline:
  the board outline again, w1.97

## Dimensions
0,0 to 0,2000 on Bottom 3D Body
0,0 to 2375,0 on Bottom 3D Body